# Altium PCB UNO-R3.PcbDoc
Units mil, origin at the board's own origin, x right, y up, seen from the top; angles counter-clockwise.
Board outline 3675 x 1540 mil, 2 copper layers (Top Layer, Bottom Layer); 49 components, 52 nets, 199 pads, 29 vias.
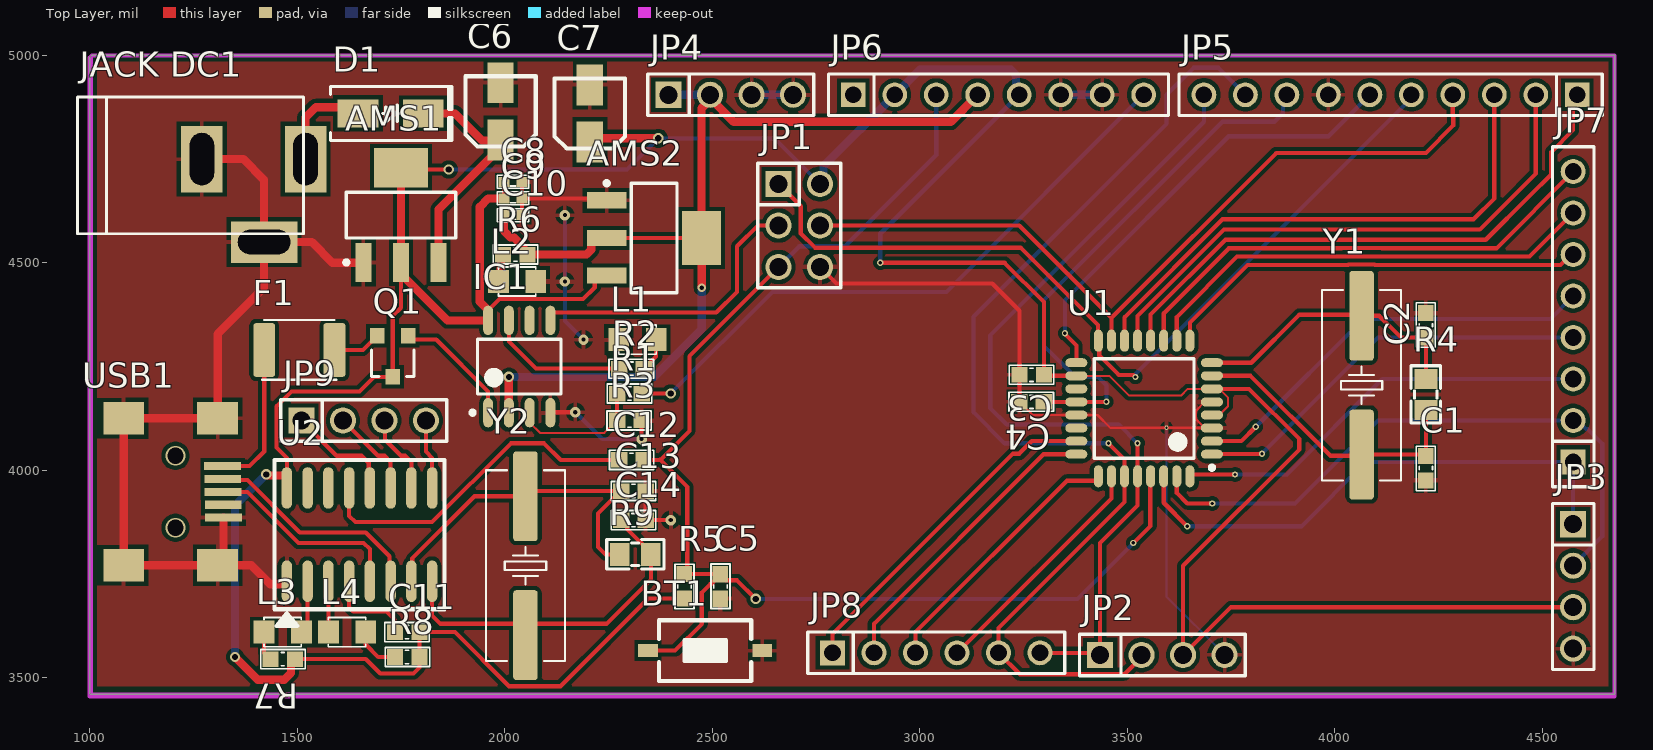
[diagram p0: Top Layer view]
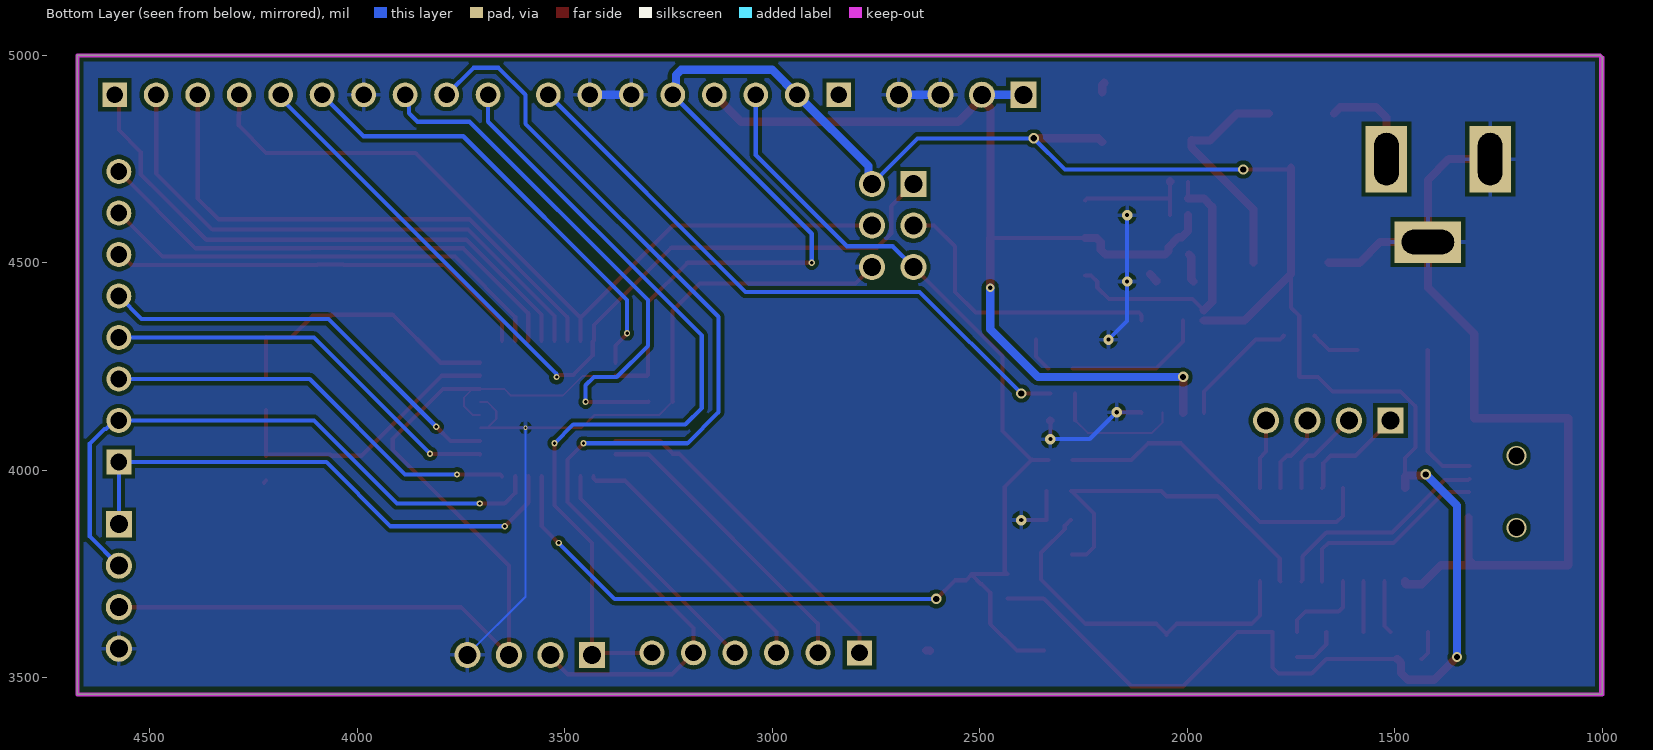
[diagram p1: Bottom Layer view, seen from below]
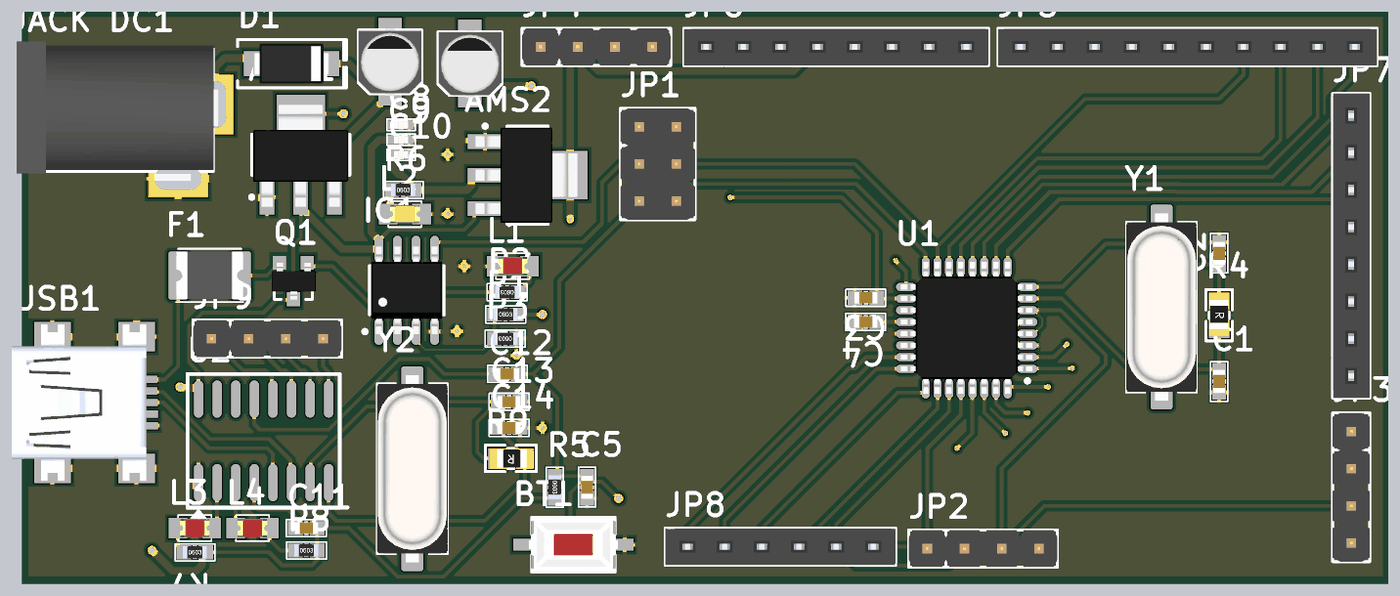
[diagram p2: 3D render of the assembled board from above, using the file's embedded part models]

## Layer stack, top to bottom
Top Solder: solder mask 0.4, Solder Resist, Dk 3.5
Top Layer: signal copper 1.4
Dielectric 1: dielectric 12.6, FR-4, Dk 4.8
Bottom Layer: signal copper 1.4
Bottom Solder: solder mask 0.4, Solder Resist, Dk 3.5

## Board outline
1000,3460 4675,3460 4675,5000 1005,5000 1000,4995

## Design rules (kind name [scope] priority, off if disabled: settings)
Clearance [All] p1: gap=10 ignorepadtopadclearanceinfootprint=FALSE except(0: Arc-Hole Track-Hole SMDPad-Hole THPad-Hole Via-Hole Fill-Hole Poly-Hole Region-Hole Text-Hole)
PolygonConnect [All] p1: connectstyle=Relief reliefconductorwidth=10 reliefentries=4 polygonreliefangle="90 Angle" airgapwidth=10
RoomDefinition UNO-R3 [InComponentClass('UNO-R3')] p1: confinementstyle=ConfineIn formatcopy=TRUE lockcomponents=FALSE outline 7045,1060 11170,1060 11170,1780 7045,1780
RoutingVias [All] p1: holewidth=10 width=25 viastyle="Through Hole" minholewidth=10 minwidth=25 maxholewidth=10 maxwidth=25
SolderMaskExpansion [All] p1: expansion=4 istentingtop=FALSE
Width [All] p1: maxlimit=20 minlimit=5 preferedwidth=10
30 further rules are at their usual default settings.

## Components (designator, comment, footprint, x,y, rotation, side; value= is the part's Value field where it differs from the comment)
AMS1 "AMS1117-3.3V" SOT223 1750,4615 r0 top value="AMS1117-3.3V SOT223"
AMS2 "AMS1117-3.3V" SOT223 2360,4560 r270 top value="AMS1117-3.3V SOT223"
BT1 "Nut Nhan 2 Chan SMD 3x6x2.5" "Nut Nhan 2 Chan SMD 3x6x2.5" 2483.19,3565.46 r180 top
C1 "22pF" "tu 0603" 4220,4005 r270 top
C2 "22pF" "tu 0603" 4220,4349.53 r90 top
C3 "104" "tu 0603" 3270,4230 r180 top
C4 "104" "tu 0603" 3269.53,4165 r180 top
C5 "104" "tu 0603" 2520,3720 r90 top
C6 "47uF" "tu nhom 4 (b)" 1990,4865 r90 top
C7 "47uF" "tu nhom 4 (b)" 2205,4860 r90 top
C8 "104" "tu 0402" 2020,4695 r0 top
C9 "104" "tu 0402" 2020,4655 r0 top
C10 "104" "tu 0402" 2020,4615 r180 top
C11 "104" "tu 0603" 1765,3610 r180 top
C12 "104" "tu 0603" 2305.47,4025 r0 top
C13 "22pF" "tu 0603" 2310,3950 r0 top
C14 "22pF" "tu 0603" 2310,3880 r0 top
D1 "M7" "DIODE SMA" 1725,4860 r0 top
F1 "2A 24V" "Cau chi tu phuc hoi 2A 24V SMD1812" 1505,4290 r180 top
IC1 "LM358 SOP8" "SOP 8" 2035,4250 r90 top
"JACK DC1" "JACK DC 5.5" "JACK DC 5.5" 1395,4650 r0 top value="Jac DC"
JP1 "JP 2x3 2.54" "JP 2x3 DT" 2710,4590 r270 top
JP2 "JP 1x4 2.54" "JP 1x4 DT" 3435,3555 r0 top
JP3 "JP 1x4 2.54" "JP 1x4 DT" 4575,3870 r270 top
JP4 "JP 1x4 2.54" "JP 1x4 DT" 2395,4905 r0 top
JP5 "JP 1x10 2.54" "JP 1x10 CT" 4585,4905 r180 top
JP6 "JP 1x8 2.54" "JP 1x8 CT" 2840,4905 r0 top
JP7 "JP 1x8 2.54" "JP 1x8 CT" 4575,4020 r90 top
JP8 "JP 1x6 2.54" "JP 1x6 CT" 2790,3560 r0 top
JP9 "JP 1x4 2.54" "JP 1x4 DT" 1510,4120 r0 top
L1 "LED 0805" LED-0805-Red 2365,4315 r180 top
L2 "LED 0805" LED-0805-Yellow 1985,4455 r0 top
L3 "LED 0805" LED-0805-Red 1420,3610 r0 top
L4 "LED 0805" LED-0805-Red 1665,3610 r180 top
Q1 "HF" SOT23 1730,4275 r180 top value=C9014
R1 "10k" "tro smd 0603" 2300.47,4185 r0 top
R2 "1k" "tro smd 0603" 2305.47,4245 r180 top
R3 "10k" "tro smd 0603" 2300.47,4120 r180 top
R4 "1M" "tro smd 0805" 4222.39,4182.77 r270 top
R5 "10k" "tro smd 0603" 2433.19,3720.46 r270 top
R6 "680R" "tro smd 0603" 2025.47,4520 r0 top
R7 "1k" "tro smd 0603" 1465,3545 r0 top
R8 "1k" "tro smd 0603" 1765,3550 r0 top
R9 "1M" "tro smd 0805" 2315,3795 r180 top
U1 "ATmega168A-AU" TQFP32 3541.04,4148.96 r180 top
U2 "CH340G" SO16 1650,3845 r90 top
USB1 "USB Mini 5p SMD" "USB Mini 5p SMD" 1185,3945 r90 top
Y1 "16Mhz" "Thach Anh 2 chan SMD" 4065,4205 r270 top value=4Mhz
Y2 "16Mhz" "Thach Anh 2 chan SMD" 2050,3770 r90 top value=4Mhz

## Footprints (in the part's own frame and the unit in brackets; to place one, negate y for a bottom-side part, rotate by r counter-clockwise, add the part's x,y. Pads: shape width x height; smd on the part's side, far side on the other; paste and mask are expansions set on the pad)
"Cau chi tu phuc hoi 2A 24V SMD1812" [mm]
  rrect25% 1.34x3.29 smd: 1(-2.15,0) 2(2.15,0)
  silkscreen extent -2.28,-1.83 2.28,1.83, body extent -2.27,-1.62 2.27,1.62, height 1.25
"DIODE SMA" [mm] "SMA"
  rect 2.5x1.7 smd: 1(-2,0) 2(2,0)
  silkscreen extent -3.68,-1.65 3.75,1.65, body extent -2.6,-1.37 2.6,1.37, height 2.4
"JACK DC 5.5" [mil] "Jac DC input"
  rect 100x160 hole 59.06 slot 125.98 at 90 deg: 1(125,100) 2(-125,100)
  rect 160x100 hole 59.06 slot 125.98 at 0 deg: 3(25,-100)
  silkscreen extent -425,-80 120,250, body extent -410,-105 134,269, height 434
"JP 1x4 DT" [mm] "4 pins, 1 row, straight, gold plating"
  rect 1.6x1.6 hole 1.1: 1(0,0)
  round 1.6 hole 1.1: 2(2.54,0) 3(5.08,0) 4(7.62,0)
  silkscreen extent -1.27,-1.27 8.89,1.27, body extent -1.27,-1.27 8.89,1.27, height 8.54
"JP 1x6 CT" [mm] "6 row, straight, gold plating"
  rect 1.52x1.52 hole 1.02: 1(0,0)
  round 1.52 hole 1.02: 2(2.54,0) 3(5.08,0) 4(7.62,0) 5(10.16,0) 6(12.7,0)
  silkscreen extent -1.52,-1.27 14.22,1.27, body extent -1.52,-1.25 14.22,1.25, height 8.51
"JP 1x8 CT" [mm] "8 row, straight, gold plating"
  rect 1.52x1.52 hole 1.02: 1(0,0)
  round 1.52 hole 1.02: 2(2.54,0) 3(5.08,0) 4(7.62,0) 5(10.16,0) 6(12.7,0) 7(15.24,0) 8(17.78,0)
  silkscreen extent -1.52,-1.27 19.3,1.27, body extent -1.52,-1.25 19.3,1.25, height 8.51
"JP 1x10 CT" [mm] "10 row, straight, gold plating"
  rect 1.52x1.52 hole 1.02: 1(0,0)
  round 1.52 hole 1.02: 2(2.54,0) 3(5.08,0) 4(7.62,0) 5(10.16,0) 6(12.7,0) 7(15.24,0) 8(17.78,0) 9(20.32,0) 10(22.86,0)
  silkscreen extent -1.52,-1.27 24.38,1.27, body extent -1.52,-1.25 24.38,1.25, height 8.51
"JP 2x3 DT" [mm]
  rect 1.6x1.6 hole 1.1: 1(-2.54,-1.27)
  round 1.6 hole 1.1: 2(0,-1.27) 3(2.54,-1.27) 4(2.54,1.27) 5(0,1.27) 6(-2.54,1.27)
  silkscreen extent -3.81,-2.54 3.81,2.54, body extent -3.81,-2.54 3.81,2.54, height 8.55
LED-0805-Red [mil]
  rect 50x55 smd: 1(0,0) 2(90,0)
  silkscreen extent 0,-35 90,35, body extent 5,-25 85,25, height 43
LED-0805-Yellow [mil]
  rect 50x55 smd: 1(0,0) 2(90,0)
  silkscreen extent 0,-35 90,35, body extent 5,-25 85,25, height 43
"Nut Nhan 2 Chan SMD 3x6x2.5" [mm] "Switch SMD type"
  rect 1.2x0.8 smd: 1(-3.5,0) 2(3.5,0)
  silkscreen extent -2.82,-1.85 2.82,1.85, body extent -3.05,-1.85 3.05,1.85, height 2.5
SO16 [mil]
  oval 100x25 smd: 1(-112.36,175) 2(-112.36,125) 3(-112.36,75) 4(-112.36,25) 5(-112.36,-25) 6(-112.36,-75) 7(-112.36,-125) 8(-112.36,-175) 9(112.36,-175) 10(112.36,-125) 11(112.36,-75) 12(112.36,-25) 13(112.36,25) 14(112.36,75) 15(112.36,125) 16(112.36,175)
  silkscreen extent -220,-205 180,205, body extent -137,-195 137,195, height 69
"SOP 8" [mm] "SOIC, 8-Leads, Body 4.9x3.9mm, Pitch 1.27mm, IPC High Density"
  oval 1.8x0.6 smd: 1(-2.825,1.905) 2(-2.825,0.635) 3(-2.825,-0.635) 4(-2.825,-1.905) 5(2.825,-1.905) 6(2.825,-0.635) 7(2.825,0.635) 8(2.825,1.905)
  silkscreen extent -2.95,-2.55 1.68,2.98, body extent -2.99,-2.45 3,2.45, height 1.6
SOT23 [mm] "SOT23"
  rect 0.9x0.95 smd: 1(-0.95,-1.25) 2(0,1.25)
  rect 0.9x0.95 smd mask+0: 3(0.95,-1.25)
  silkscreen extent -1.3,-0.38 1.3,1.25, body extent -1.52,-1.23 1.48,1.27, height 1.06
SOT223 [mm]
  rect 1x2.4 smd: 1(-2.3,-2.9) 2(0,-2.9) 3(2.3,-2.9)
  rect 3.3x2.4 smd: 4(0,2.9)
  silkscreen extent -3.47,-3.02 3.35,1.4, body extent -3.25,-3.56 3.25,3.4, height 1.68
"Thach Anh 2 chan SMD" [mm] "SMD Crystal HC49/US-SM package"
  round 0.508 on Mech15: 0(0,0)
  rrect25% 5.5x1.5 smd: 1(-4.25,0) 2(4.25,0)
  silkscreen extent -5.84,-2.41 5.84,2.41, body extent -6.4,-2.41 6.4,2.42, height 4.29
TQFP32 [mm] "Thin QFP, 32-Leads, Body 9x9mm, Pitch 0.8mm, IPC Low Density"
  oval 1.35x0.55 smd: 1(-4.15,2.8) 2(-4.15,2) 3(-4.15,1.2) 4(-4.15,0.4) 5(-4.15,-0.4) 6(-4.15,-1.2) 7(-4.15,-2) 8(-4.15,-2.8) 17(4.15,-2.8) 18(4.15,-2) 19(4.15,-1.2) 20(4.15,-0.4) 21(4.15,0.4) 22(4.15,1.2) 23(4.15,2) 24(4.15,2.8)
  oval 0.55x1.35 smd: 9(-2.8,-4.15) 10(-2,-4.15) 11(-1.2,-4.15) 12(-0.4,-4.15) 13(0.4,-4.15) 14(1.2,-4.15) 15(2,-4.15) 16(2.8,-4.15) 25(2.8,4.15) 26(2,4.15) 27(1.2,4.15) 28(0.4,4.15) 29(-0.4,4.15) 30(-1.2,4.15) 31(-2,4.15) 32(-2.8,4.15)
  silkscreen extent -4.28,-3.05 3.05,3.75, body extent -4.5,-4.5 4.5,4.5, height 1.4
"tro smd 0603" [mm] "Chip Capacitor, 2-Leads, Body 1,60x0,80mm, IPC Medium Density"
  rect 1x0.95 smd mask+0.076: 1(-0.75,0) 2(0.75,0)
  silkscreen extent -1.35,-0.58 1.37,0.58, body extent -0.82,-0.42 0.82,0.43, height 0.44
"tro smd 0805" [mm]
  rect 1.2x1.4 smd: 1(-0.946,-0.061) 2(0.954,-0.061)
  silkscreen extent -1.75,-0.97 1.75,0.84, body extent -1.56,-0.76 1.44,0.64, height 0.53
"tu 0402" [mm]
  rect 0.65x0.6 smd: 1(-0.55,0) 2(0.55,0)
  silkscreen extent -0.97,-0.38 0.97,0.41, body extent -0.5,-0.27 0.5,0.26, height 0.35
"tu 0603" [mm] "Chip Capacitor, 2-Leads, Body 1,60x0,80mm, IPC Medium Density"
  rect 1x0.95 smd mask+0.076: 1(-0.75,0) 2(0.75,0)
  silkscreen extent -1.35,-0.58 1.37,0.58, body extent -0.8,-0.4 0.8,0.4, height 0.9
"tu nhom 4 (b)" [mm]
  rect 2.5x1.6 smd: 1(-1.75,0) 2(1.75,0)
  silkscreen extent -2.15,-2.15 2.15,2.15, body extent -2.31,-2.15 2.29,2.15, height 3.91
"USB Mini 5p SMD" [mm]
  rect 0.5x2.25 smd: 1(1.651,-3.429) 2(0.864,-3.442) 3(0.076,-3.454) 4(-0.711,-3.467) 5(-1.499,-3.48)
  rect 2x2.5 smd: 5(-4.424,-3.124) 5(-4.42,2.616) 5(4.576,-3.124) 5(4.58,2.616)
  body extent -5.27,-3.8 5.43,5.4, height 3.95

## Part data
AMS1 AMS2: library part "AMS1117 SMD", "Dán", Chung_Loai=Dán, Don_Vi=Con, Ma_Hang=MH000596
C1 C2 C13 C14: library part "Tu 0603 22pF 50V 10%", "Dán", Chung_Loai=Dán, Don_Vi=Con, Ma_Hang=MH004570, So_Chan=2, Ten_Linh_Kien="Tụ 0603 22pF 50V 10%"
C3 C4 C5 C11 C12: library part "Tu 0603 104 50V 10%", "Dán", Chung_Loai=Dán, Don_Vi=Con, Ma_Hang=MH004568, So_Chan=2, Ten_Linh_Kien="Tụ 0603 104-100nF 10% 50V"
C6 C7: library part "Tu Nhom 2.2uF 50V", "Dán", Chung_Loai=Dán, Don_Vi=Con, Ma_Hang=MH004015, So_Chan=2, Ten_Linh_Kien="Tụ Nhôm 2.2uF 50V"
C8 C9 C10: library part "Tu 0402 220nF 6.3V 20%", "Dán", Chung_Loai=Dán, Don_Vi=Con, Ma_Hang=MH008102, So_Chan=2, Ten_Linh_Kien="Tụ 0402 220nF 6.3V 20%"
D1: library part "Diode M7 ( 4007 )", "Dán", Chung_Loai=Dán, Don_Vi=Con, Ma_Hang=MH000944, Ten_Linh_Kien="Diode M7 1N4007 SMD 1A 1000V"
F1: library part "Cau chi tu phuc hoi 2A 24V SMD1812", "2A 24V SMD1812", Ma_Hang=MH010033, Ten="Cầu Chì Tự Phục Hồi 2A 24V SMD1812"
IC1: "Dán", Chung_Loai=Dán, Don_Vi=Con, Ma_Hang=MH000609, Ten_Linh_Kien="LM358 SOP8"
JP1: library part "JP 2x3 2.54 Duc Thang", "Cắm", Chung_Loai=Cắm, Don_Vi=Con, Ma_Hang=MH002686, Ten_Linh_Kien="Jump Đôi Đực 2.54MM 2x40P Thẳng 11MM"
JP2 JP3 JP4 JP9: library part "JP 1x4 2.54 Duc Thang", "Cắm", Chung_Loai=Cắm, Don_Vi=Con, Ma_Hang=MH000903, Ten_Linh_Kien="Jump Đơn Đực 2.54MM 1x40P Thẳng 11MM"
JP5: library part "JP 1x10 2.54 Cai Thang", "Cắm", Chung_Loai=Cắm, Don_Vi=Con, Ma_Hang=MH004006, Ten_Linh_Kien="Jump Đơn Cái 2.54MM 1x20P Thẳng"
JP6 JP7: library part "JP 1x8 2.54 Cai Thang", "Cắm", Chung_Loai=Cắm, Don_Vi=Con, Ma_Hang=MH004006, Ten_Linh_Kien="Jump Đơn Cái 2.54MM 1x20P Thẳng"
JP8: library part "JP 1x6 2.54 Cai Thang", "Cắm", Chung_Loai=Cắm, Don_Vi=Con, Ma_Hang=MH004006, Ten_Linh_Kien="Jump Đơn Cái 2.54MM 1x20P Thẳng"
L1 L3 L4: library part "LED 0805 Do", "Dán", Chung_Loai=Dán, Don_Vi=Con, Ma_Hang=MH000897, Ten_Linh_Kien="LED 0805 Màu Đỏ (Red)"
L2: library part "LED 0805 Vang", "Dán", Chung_Loai=Dán, Don_Vi=Con, Ma_Hang=MH002329, Ten_Linh_Kien="LED 0805 Màu Vàng ( Yellow)"
Q1: library part "C1815 HF SMD", "NPN transistor"
R1 R2 R3 R5 R7 R8: library part "Tro 0603 5% 1k", "Dán", Chung_Loai=Dán, Don_Vi=Con, Ma_Hang=MH006319, So_Chan=2, Ten_Linh_Kien="Trở 0603 5% 1k"
R4 R9: library part "Tro 0805 1% 1M", "Dán", Chung_Loai=Dán, Don_Vi=Con, Ma_Hang=MH005469, So_Chan=2, Ten_Linh_Kien="Trở 0805 1% 1M"
R6: library part "Tro 0603 1% 680R", "Dán", Chung_Loai=Dán, Don_Vi=Con, Ma_Hang=MH006336, So_Chan=2, Ten_Linh_Kien="Trở 0603 1% 680R"
U1: "8-bit AVR Microcontroller, 16KB Flash, 512 Bytes EEPROM, 1KB SRAM, 32-pin TQFP, Industrial Grade (-40°C to 85°C)", Supplier Part Number 1=ATMEGA168A-AU-ND, Code_JEDEC=MS-026-ABA, ComponentLink1Description="Manufacturer Link", ComponentLink1URL=http://www.atmel.com/products/avr/default.asp?, ComponentLink2Description="ATmega48A/48PA/88A/88PA/168A/168PA/328/328P Datasheet", ComponentLink2URL=http://www.atmel.com/dyn/resources/prod_documents/8271.pdf, ComponentLink3Description="ATmega48A/48PA/88A/88PA/168A/168PA/328/328P Summary", ComponentLink3URL=http://www.atmel.com/dyn/resources/prod_documents/8271S.pdf, ComponentLink4Description="Atmel.com Home", ComponentLink4URL=http://www.atmel.com, DatasheetVersion="revA, Jan-2010", PackageDescription="32-Lead, 7x7x1.0 mm Body, 0.8mm Lead Pitch, Thin Profile Plastic Quad Flat Package (TQFP)", PackageReference=32A, PackageVersion="revB, Oct-2001", Published=1-Apr-2010, Publisher="Altium Limited", Supplier 1=Digi-Key, Supplier 2=Mouser, Supplier Part Number 2=556-ATMEGA168A-AU
U2: "High and Low Side Driver", ComponentLink1Description="Manufacturer Link", ComponentLink1URL=http://www.irf.com/, ComponentLink2Description=Datasheet, ComponentLink2URL=http://www.irf.com/product-info/datasheets/data/ir2110.pdf, DatasheetVersion=PD60147J, LatestRevisionDate=04-Mar-2005, LatestRevisionNote="Stylized 3D Model Added.", Note="Pins 4, 8 and 14 are not connected", PackageDescription="DIP; 14 Leads; Row Spacing 7.62 mm; Pitch 2.54 mm", PackageReference=PDIP14, Published=8-Jun-2000, Publisher="Altium Limited"
USB1: "USB Type B", Ma_Hang=MH001022, Ten="MiniUSB 5P SMD"
Y1 Y2: library part "Thach Anh 2 chan SMD", "Crystal For all Crystal 2pin."
BT1: Ma_Hang=MH001036, Ten="Nút Nhấn 2 Chân 3x6x2.5MM SMD"

## Via types
v1: diameter 15, hole 8, Top Layer to Bottom Layer, 12 vias
v2: diameter 25, hole 15, Top Layer to Bottom Layer, 7 vias
v3: diameter 25, hole 10, Top Layer to Bottom Layer, 6 vias
v4: diameter 47.24, hole 39.37, Top Layer to Bottom Layer, 2 vias
v5: diameter 10, hole 5, Top Layer to Bottom Layer, 1 vias
v6: diameter 20, hole 10, Top Layer to Bottom Layer, 1 vias

## Nets (pads, with @x,y where several pads share a name; then routed paths per layer and width w, separated by ;. In a path a pad name is that pad's centre, name@x,y a point inside that pad or via, vN(x,y) a via of type N, cw(c..) or ccw(c..) an arc to the next point about the centre after c; other vN are vias at no path point)
+3.3: AMS2.2 AMS2.4 C10.2 IC1.2 JP4.1 JP4.2 JP6.4 R6.2 | length 2538.4
  Top Layer w10: AMS2.2 AMS2.4
  Top Layer w20: C10.2 1998.35,4576.65 2013.18,4561.82 2020.8,4561.82 2045.31,4537.3 2045.31,4528.7 2054.02,4520 2196.87,4520 2208.58,4531.72 2208.58,4550.31 2218.27,4560 AMS2.2 ; IC1.2 v2(2010,4225) ; v6(2475,4440) 2475,4559.17 AMS2.4 2474.17,4872.54 2495,4893.37 JP4.2@2495,4896.72 ; JP4.2 JP4.2@2495,4896.72 ; JP6.4 3075,4840 2551.72,4840 JP4.2@2495,4896.72
  Bottom Layer w20: v2(2010,4225) 2360,4225 2475,4340 v6(2475,4440) ; JP4.1 JP4.2
+5: AMS1.2 AMS1.4 AMS2.3 C3.1 C7.1 C8.1 C9.1 C11.1 IC1.8 JP1.6 JP2.3 JP3.3 JP6.2 JP6.5 Q1.2 R5.2 R7.2 R8.2 U1.4 U1.6 U1.18 U2.16 | length 9377.4
  Top Layer w5: U1.18 3457.3,4227.7 3505,4180 3630,4180 3646.2,4196.2 U1.6 ; U1.4 3721.67,4133.21 3743.5,4155.05 3743.5,4174.37 U1.6@3721.67,4196.2
  Top Layer w10: U2.16@1475,3985.12 1475,4030 1450,4055 1450,4154.14 1485.86,4190 1650,4190 1685,4225 1729.21,4225 Q1.2 1730,4371.79 1750,4391.79 AMS1.2@1750,4473.27 ; R7.2 1665,3545 1700,3510 1780,3510 1794.53,3524.53 R8.2 C11.1 1880.02,3610 2010.61,3479.41 2134.41,3479.41 2345.94,3690.94 R5.2 ; AMS1.4 1754.17,4725 v2(1865,4725) ; IC1.8@1960,4385.82 1960.98,4385.82 1987.66,4412.5 2188.88,4412.5 2217,4440.62 2217,4454.76 2231.68,4469.45 AMS2.3 ; C9.1 C8.1 ; v1(2905,4500) 3205,4500 3299.53,4405.47 C3.1 3301.83,4227.7 U1.18 ; U1.6 3721.67,4196.2 3793.8,4196.2 3915,4075 3915,4050 3635,3770 JP2.3 3750,3670 JP3.3
  Top Layer w20: v2(1350,3550) 1405,3495 1468.28,3495 1484.84,3511.56 1484.84,3536.3 1493.54,3545 R7.2 ; v2(1425,3990) 1427.57,3987.43 1472.69,3987.43 1475,3985.12 U2.16 ; AMS1.4 AMS1.2 1750,4473.27 1862.05,4361.22 IC1.8 ; IC1.8@1960,4385.82 1940,4405.82 1940,4635 1960,4655 C9.1 ; C7.1 2213.9,4800 v2(2370,4800)
  Bottom Layer w10: v2(1865,4725) 2295,4725 v2(2370,4800) 2650,4800 JP1.6 ; v1(2905,4500) 2905,4570 JP6.5
  Bottom Layer w20: v2(1350,3550) 1350,3915 v2(1425,3990) ; JP1.6 2768.23,4698.23 2768.23,4733.23 JP6.2 3000,4965 3220,4965 3232.38,4952.62 3232.38,4912.62 JP6.5
AD0: JP8.1 U1.23 | length 903.1
  Top Layer w5: 3300,4070 3377.43,4070 U1.23
  Top Layer w10: JP8.1 2790,3605 3225,4040 3240,4040 3270.22,4070.22 U1.23
AD1: JP8.2 U1.24 | length 727
  Top Layer w10: JP8.2 2890,3630 3298.72,4038.72 U1.24
AD2: JP8.3 U1.25 | length 649.5
  Top Layer w10: JP8.3 2990,3610 3354.83,3974.83 3425.42,3974.83 3430.8,3980.21 U1.25
AD3: JP8.4 U1.26 | length 579.8
  Top Layer w10: JP8.4 3462.3,3932.3 U1.26
AD4/SDA: JP2.2 JP5.9 JP8.5 U1.27 | length 2592.9
  Top Layer w10: v1(3455,4065) 3493.8,4026.2 U1.27 3493.8,3923.8 3190,3620 JP8.5 3241.5,3508.5 3493.5,3508.5 3535,3550 JP2.2
  Bottom Layer w10: v1(3455,4065) 3205,4065 3130,4140 3130,4370 3595,4835 3595,4905 3660,4970 3720,4970 JP5.9
AD5/SCL: JP2.1 JP5.10 JP8.6 U1.28 | length 2053.1
  Top Layer w10: JP8.6 3430,3560 JP2.1 3435,3824.71 3525.29,3915 U1.28 3525.15,3985.72 3525.15,4064.85 v1(3525,4065)
  Bottom Layer w10: v1(3525,4065) 3480,4110 3210,4110 3170,4150 3170,4325 3685,4840 JP5.10
AREF: C4.1 JP5.8 U1.20 | length 1301.1
  Top Layer w10: C4.1 3299.35,4164.71 U1.20 3377.8,4164.85 3449.85,4164.85 v1(3450,4165)
  Bottom Layer w10: v1(3450,4165) 3450,4205 3430,4225 3375,4225 3300,4300 3300,4410 3730,4840 3855,4840 3875.46,4860.46 3875.46,4895.46 JP5.8
CTS: JP9.4 U2.9 | length 168.9
  Top Layer w10: JP9.4 1810,4045 1825,4030 U2.9
DCD: JP9.1 U2.12 | length 266.1
  Top Layer w10: JP9.1 1595,4035 1655,4035 1672.13,4017.87 1672.13,3960.23 U2.12
DSR: JP9.3 U2.10 | length 195.4
  Top Layer w10: JP9.3 1711.5,4118.5 1711.5,4073.5 1750,4035 1760,4035 1775,4020 U2.10
DTR: C12.1 U2.13 | length 819.8
  Top Layer w10: U2.13 1625,3890 1640,3875 1825,3875 2015,4065 2095,4065 2135,4025 C12.1
GND: "JACK DC1.2" "JACK DC1.3" AMS1.1 AMS2.1 BT1.1 C1.2 C2.2 C3.2 C4.2 C5.1 C6.2 C7.2 C8.2 C9.2 C10.1 C13.2 C14.2 IC1.4 JP1.4 JP2.4 JP3.4 JP4.3 JP4.4 JP5.7 JP6.6 JP6.7 L1.2 L2.2 R3.1 U1.3 U1.5 U1.21 U2.1 USB1.5 | length 5433.9
  Top Layer w5: C4.2 3240.98,4165 3272.77,4133.21 U1.21 3428.75,4133.21 3459.47,4102.5 v5(3595,4102.5) U1.3@3686.4,4102.5 ; U1.3 3703.64,4102.5 U1.3@3686.4,4102.5 ; U1.5 3687.18,4164.71 3665.35,4142.87 3665.35,4123.55 U1.3@3686.4,4102.5
  Top Layer w10: C10.1 C9.2 ; C8.2 C9.2 ; IC1.4 2111.22,4140 v3(2170,4140) ; AMS2.1 2241.38,4655 C9.2 ; v3(2330,4075) R3.1 ; C13.2 C14.2 v3(2400,3880) ; JP1.4 2800,4450 3175,4450 3240.47,4384.53 C3.2 3240.47,4165.47 C4.2 ; C1.2 C1.2@4225.47,3970
  Top Layer w20: 1270,4750 1370,4750 1420,4700 1420,4550 ; USB1.5@1308,3770.83 1389.17,3770.83 1435,3725 1472.69,3725 1475,3727.31 U2.1 ; USB1.5@1322,3886 1322,3785.17 1307.83,3771 1082,3771 1082,4125.33 1082.17,4125.17 1308,4125.17 1308,4328 1420,4440 1420,4550 ; AMS1.1 1658.62,4500 1585,4500 1535,4550 1420,4550 ; C8.2 2040.91,4695.75 C8.2@2041.65,4696.5 ; L2.2 2075,4457.5 L2.2@2090,4472.5 ; C7.2@2200,4933.9 C7.2 C7.2@2205,4911.18 ; R3.1 R3.1@2330.67,4119.33 ; BT1.1@2620.52,3565 BT1.1 BT1.1@2628.86,3565.46 ; JP5.7 JP5.7@3985,4913.28
  Bottom Layer w5: v5(3595,4102.5) 3595,3695 JP2.4
  Bottom Layer w10: v3(2145,4615) v3(2145,4455) 2145,4360 v3(2190,4315) ; v3(2170,4140) 2235,4075 v3(2330,4075) ; JP2.4 JP2.4@3742.5,3562.5 ; JP3.4@4567.5,3562.5 JP3.4
  Bottom Layer w20: JP4.3 JP4.4 ; JP6.6 JP6.7
IO0/RX: JP3.1 JP7.1 U1.30 | length 1288.3
  Top Layer w10: U1.30 3588.28,3921.72 v1(3645,3865)
  Bottom Layer w10: v1(3645,3865) 3920,3865 4075,4020 JP7.1 JP3.1
IO1/TX: JP3.2 JP7.2 U1.31 | length 1505.1
  Top Layer w10: U1.31 3619.78,3945.22 3645,3920 v1(3705,3920)
  Bottom Layer w10: v1(3705,3920) 3905,3920 4105,4120 4585.6,4120 4605.78,4099.82 4609.33,4099.82 4621.84,4087.3 4645,4064.14 4645,3840 JP3.2
IO2: JP7.3 U1.32 | length 1020.8
  Top Layer w10: U1.32 3655.7,3990 v1(3760,3990)
  Bottom Layer w10: v1(3760,3990) 3885,3990 4115,4220 JP7.3
IO3: JP7.4 U1.1 | length 987.1
  Top Layer w10: U1.1 3705.06,4039.36 3824.36,4039.36 v1(3825,4040)
  Bottom Layer w10: v1(3825,4040) 4105,4320 JP7.4
IO4: JP7.5 U1.2 | length 1015.5
  Top Layer w10: U1.2 3775.22,4070.22 v1(3810,4105)
  Bottom Layer w10: v1(3810,4105) 4070,4365 4520,4365 JP7.5
IO5: JP7.6 U1.9 | length 1036
  Top Layer w10: U1.9 3651.28,4356.28 3790,4495 4032.99,4495 4033.58,4495.59 4096.42,4495.59 4097.01,4495 4544.76,4495 4569.76,4520 JP7.6
IO6: JP7.7 U1.10 | length 1116.8
  Top Layer w10: U1.10 3619.78,4369.78 3765,4515 4024.71,4515 4025.3,4515.59 4104.7,4515.59 4105.29,4515 4470,4515 JP7.7
IO7: JP7.8 U1.11 | length 1194.7
  Top Layer w10: U1.11 3588.28,4378.28 3745,4535 4016.42,4535 4017.02,4535.59 4112.98,4535.59 4113.58,4535 4390,4535 JP7.8
IO8: JP5.1 U1.12 | length 1385.9
  Top Layer w10: U1.12 3556.79,4375.07 3737.31,4555.59 4364.41,4555.59 4469.7,4660.89 4522.35,4713.53 4522.35,4767.35 4575,4820 4575,4895 JP5.1
IO9: JP5.2 U1.13 | length 1351.4
  Top Layer w10: U1.13 3525.29,4371.86 3733.43,4580 4350,4580 4485,4715 JP5.2
MISO: JP1.1 JP5.5 U1.16 | length 2087.6
  Top Layer w10: JP1.1 2713.5,4636.5 2713.5,4570.74 2747.75,4536.5 3243.5,4536.5 3430,4350 3430,4313.15 U1.16 3433.03,4310.12 3433.03,4276.97 3480,4230 3515,4230 v1(3520,4225)
  Bottom Layer w10: v1(3520,4225) 3520,4232.5 4185,4897.5 JP5.5
MOSI: JP1.5 JP5.4 U1.15 | length 1939.6
  Top Layer w10: JP1.5 3240,4590 3462.3,4367.7 ; U1.15 3462.3,4367.7 ; JP5.4 4285,4856.85 4285.86,4855.99 4285.86,4830.86 4220,4765 3859.6,4765 3462.3,4367.7
NetAMS1_3: AMS1.3 C6.1 D1.2 | length 570.8
  Top Layer w20: D1.2 1880,4860 1945,4795 1988.9,4795 C6.1 1990,4778.39 1840.55,4628.94 AMS1.3
NetD1_1: "JACK DC1.1" D1.1 | length 242.8
  Top Layer w20: 1520,4750 1520,4850 1545,4875 1631.26,4875 D1.1
NetF1_2: F1.2 USB1.1 | length 359.6
  Top Layer w10: USB1.1 1385,4010 1420.35,4045.35 F1.2
NetIC1_3: IC1.3 R1.1 R3.2 | length 321.9
  Top Layer w5: IC1.3 2060,4115 2085,4090 2239.96,4090 R3.2@2269.96,4120
  Top Layer w10: R3.2@2269.96,4120 2270.94,4120.98 R1.1
NetIC1_5: IC1.5 JP1.2 | length 716.4
  Top Layer w10: IC1.5 2110,4373.55 2116.29,4379.84 2509.84,4379.84 2560,4430 2560,4540 2610,4590 JP1.2
NetIC1_7: IC1.7 R2.2 | length 344.1
  Top Layer w10: IC1.7 2010,4310 2075,4245 R2.2
NetL1_1: L1.1 R2.1 | length 83
  Top Layer w10: R2.1 2335.98,4245 2365,4274.02 L1.1
NetL2_1: L2.1 R6.1 | length 69.5
  Top Layer w20: L2.1 1990.47,4460.47 1990.47,4514.53 R6.1
NetL3_1: L3.1 R7.1 | length 72
  Top Layer w10: L3.1 1420,3559.49 1434.49,3545 R7.1
NetL3_2: L3.2 U2.2 | length 128.9
  Top Layer w10: L3.2 1525,3625 U2.2
NetL4_1: L4.1 R8.1 | length 112.9
  Top Layer w10: L4.1 1665,3580 1695,3550 R8.1
NetL4_2: L4.2 U2.3 | length 122.6
  Top Layer w10: L4.2 U2.3
NetU2_5: U2.5 USB1.3 | length 488.9
  Top Layer w10: USB1.3 1380.29,3948 1417.81,3910.48 1417.81,3909.88 1502.69,3825 1660,3825 1675,3810 U2.5
NetU2_6: U2.6 USB1.2 | length 540.5
  Top Layer w10: USB1.2 1323.32,3976.18 1380.4,3976.18 1437.81,3918.77 1437.81,3918.16 1505.97,3850 1665,3850 1722.13,3792.87 1722.13,3735.51 U2.6
PWR: IC1.1 Q1.1 | length 299.4
  Top Layer w10: Q1.1 1776.61,4315 1835,4315 1960,4190 IC1.1
RESET: BT1.2 C5.2 C12.2 JP1.3 JP6.3 R5.1 U1.29 | length 3200.8
  Top Layer w10: C12.2 2373.28,4025 2374.14,4025.86 2440,3960 2440,3756.8 R5.1 2519.54,3749.99 C5.2 C5.2@2520,3748.54 ; BT1.2 2410.46,3565.46 2475,3630 2475,3705.07 2495.09,3725.16 2496.61,3725.16 C5.2@2520,3748.54 ; 2375,4025 2445,4095 2445,4275 JP1.3 ; v2(2605,3690) 2560.16,3734.84 2533.7,3734.84 C5.2@2520,3748.54 ; v1(3515,3825) 3555.89,3865.89 3555.89,3984.68 U1.29
  Bottom Layer w10: v2(2605,3690) 3380,3690 v1(3515,3825) ; JP1.3 2710,4540 2820,4540 3040,4760 JP6.3
RI: JP9.2 U2.11 | length 219.1
  Top Layer w10: JP9.2 1695,4035 1710,4035 1725,4020 U2.11
SCK: JP5.6 U1.17 | length 1102.3
  Top Layer w10: v1(3350,4330) 3350,4328.74 3377.65,4301.09 U1.17
  Bottom Layer w10: v1(3350,4330) 3350,4410 3745,4805 3985,4805 JP5.6
SS: JP5.3 U1.14 | length 1316.1
  Top Layer w10: U1.14 3493.8,4368.65 3730.15,4605 4335,4605 4385,4655 JP5.3
V3: C11.2 U2.4 | length 215.3
  Top Layer w10: U2.4 1625,3670 1635,3660 1715,3660 1735.47,3639.53 C11.2
Vin: JP6.8 R1.2 | length 1508.2
  Top Layer w10: R1.2 v2(2400,4185)
  Bottom Layer w10: v2(2400,4185) 2645,4430 3065,4430 JP6.8
VUSB: F1.1 Q1.3 | length 117.7
  Top Layer w10: F1.1 1658.39,4290 1678.9,4310.51 1679.88,4310.51 1692.6,4323.23 Q1.3
XT1: C13.1 R9.2 U2.7 Y2.2 | length 843.5
  Top Layer w10: U2.7 1777.01,3734.65 1777.01,3787.01 1927.32,3937.32 Y2.2 2062.68,3950 C13.1@2279.49,3950 ; R9.2 2242.61,3797.39 2225,3815 2225,3895.51 C13.1@2279.49,3950 ; C13.1 C13.1@2279.49,3950
XT2: C14.1 R9.1 U2.8 Y2.1 | length 861.8
  Top Layer w10: U2.8 1825,3650 1845,3630 2025.65,3630 Y2.1@2050,3605.65 ; C14.1 2281.46,3880 2295.16,3866.3 2295.16,3858.4 2352.23,3801.33 R9.1 2352.23,3737.23 2245,3630 2074.35,3630 Y2.1@2050,3605.65 ; Y2.1@2050,3605.65 Y2.1 Y2.1@2050,3605.65
XTAL1: C1.1 R4.2 U1.7 Y1.2 | length 708.5
  Top Layer w10: U1.7 3797.3,4227.7 3990,4035 4062.32,4035 Y1.2 4216.85,4037.68 C1.1 R4.2
XTAL2: C2.1 R4.1 U1.8 Y1.1 | length 687
  Top Layer w10: U1.8 3799.2,4259.2 3915,4375 4062.32,4375 Y1.1 4107.68,4372.32 4160,4320 4219.53,4320 4220,4320.47 R4.1
pads on no net: IC1.6 JP6.1 U1.19 U1.22 U2.14 U2.15 USB1.4 Y1.0 Y2.0
copper on no net:
  other v4: 1206.43,3861.39 1206.43,4034.61

## Polygon pours and split planes (outlines as drawn)
GND on Top Layer "GND_L01_P000" (solid, pour order 0): 4665,4985 4665,3480 1015,3480 1015,4985
GND on Bottom Layer "GND_L02_P001" (solid, pour order 1): 1015,4985 1015,3480 4659.71,3480 4659.71,4984.71 1017.79,4984.71

## Keep-outs
Top Layer:
  lines w10: 1000,3455 1000,4995 1005,5000 4675,5000 4675,3505 4675,3455 1000,3455
Keep-Out Layer:
  lines w10: 1000,3460 4675,3460 ; 1000,3460 1002.5,3462.5 1002.5,4997.5 1005,5000 ; 1000,3460 1000,4995 1005,5000 ; 1000,3460 4675,3460 ; 1005,5000 1922.5,5000 3757.5,5000 4675,5000 ; 1005,5000 4675,5000 ; 4675,3460 4675,5000 ; 4675,3460 4675,5000